# Altium PCB PCB1.PcbDoc (part 3 of 3)
Units mil, origin at the board's own origin, x right, y up, seen from the top; angles counter-clockwise.
Board outline 3937.01 x 3937.01 mil, 4 copper layers (L1, L2, L3, L4), stack 61.851 mil thick; 165 components, 197 nets, 827 pads, 400 vias.
Unrouted connection lines stored in the file: 1.
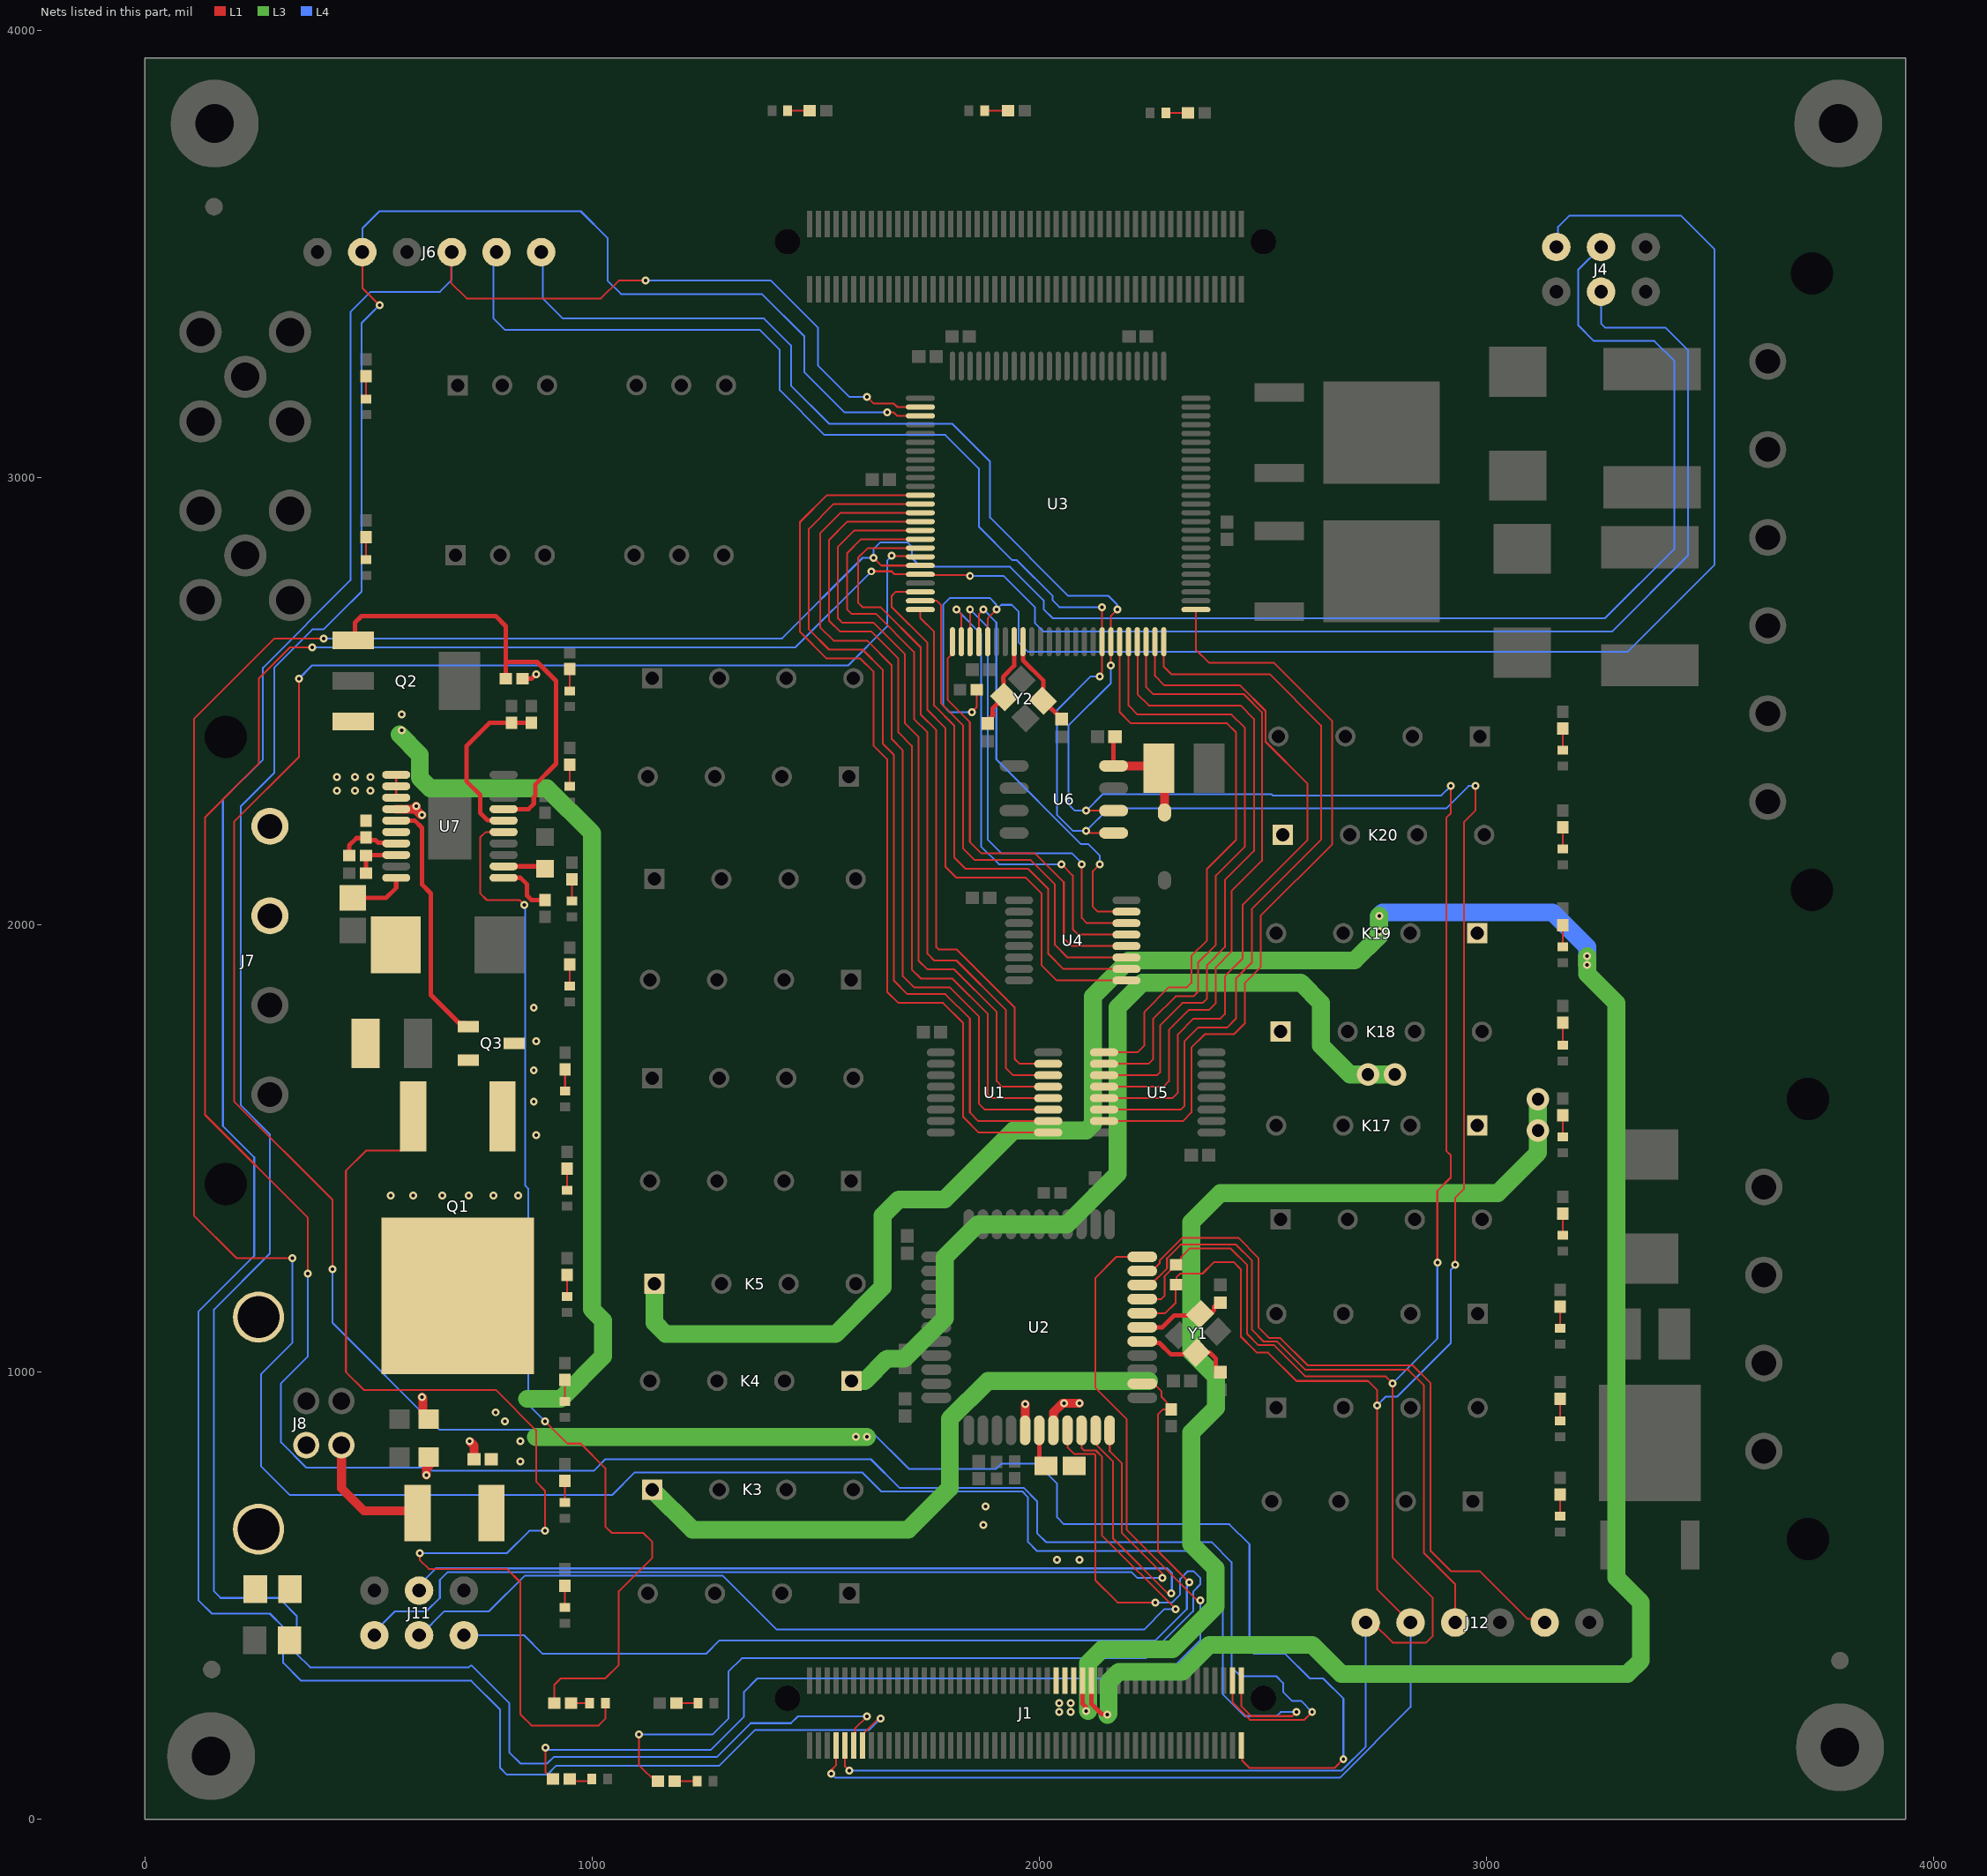
[diagram p5: the nets of this part, all layers, seen from the top]

## Via types
v1: diameter 17.72, hole 7.87, L1 to L4, 396 vias
v2: diameter 50, hole 28, L1 to L4, 4 vias

## Nets (pads, with @x,y where several pads share a name; then routed paths per layer and width w, separated by ;. In a path a pad name is that pad's centre, name@x,y a point inside that pad or via, vN(x,y) a via of type N, cw(c..) or ccw(c..) an arc to the next point about the centre after c; other vN are vias at no path point) (continued)
MOSI: J1.97 J4.4 U3.21 | length 9085.2
  L1 w4: v1(365,1220) 365,1345 135,1575 135,2240 255,2360 255,2550 325,2620 v1(375,2620) ; v1(1625,2790) 1670,2790 1676.85,2783.15 U3.21@1734.14,2783.15 1735.64,2781.66 1843.34,2781.66 v1(1845,2780) ; J1.97@2431.85,310.51 2431.85,261.84 2470.93,222.76 2592.76,222.76 v1(2610,240)
  L4 w4: v1(365,1220) 365,1035 305,975 305,842.67 361.81,785.86 636.57,785.86 643.29,779.14 1004.14,779.14 1030,805 1623.69,805 1687.62,741.07 1965.24,741.07 1995,711.31 1995,640 2015,620 2385,620 2430,575 2430,340 2450,320 2530,320 2545,305 2545,285 2565,265 2585,265 v1(2610,240) ; v1(375,2620) 1455,2620 v1(1625,2790) ; v1(1845,2780) 1920,2780 1990,2710 1990,2675 2010,2655 3280,2655 3450,2825 3450,3285 3400,3335 3265,3335 3255.97,3344.03 J4.4@3255.97,3415
NetC15_2: C15.2 U2.6 | length 85.9
  L1 w4: C15.2@2000,805 C15.2@2015,790
  L1 w10: C15.2@2000,805 U2.6@2000,869.68
NetC18_2: C18.2 U2.16 Y1.1 | length 213.4
  L1 w4: U2.16@2230.31,1068.5 U2.16@2233.6,1065.22 ; Y1.1@2344.43,1040.46 2345.82,1041.85 Y1.1@2347.22,1043.24
  L1 w10: U2.16@2233.6,1065.22 2268.4,1065.22 2293.62,1040 2301.54,1040 2301.73,1039.81 2309.19,1039.81 2309.38,1040 2320.42,1040 2320.88,1040.46 Y1.1@2344.43,1040.46 ; Y1.1@2347.22,1043.24 2381.76,1043.24 2395,1030 C18.2@2395,1000.08
NetC19_2: C19.2 U2.17 Y1.3 | length 207.6
  L1 w4: Y1.3@2352.78,1126.76 Y1.3@2355.57,1129.54
  L1 w10: U2.17@2230.31,1100 2275,1100 2301.76,1126.76 Y1.3@2352.78,1126.76 ; Y1.3@2355.57,1129.54 2379.12,1129.54 2381.7,1132.12 2384.82,1132.12 2390.83,1138.13 2390.83,1145.75 2400,1154.92 C19.2@2407.54,1162.46
NetC20_2: C20.2 C21.2 D1.2 U6.8 | length 274.2
  L1 w4: C20.2@2166.22,2416.93 C20.2@2169.29,2420 ; C21.2@2262.8,2355 C21.2@2267.8,2350 C21.2@2280,2337.8
  L1 w10: U6.8@2166.22,2355 C20.2@2166.22,2416.93
  L1 w20: U6.8@2166.22,2355 C21.2@2262.8,2355 ; D1.2@2280,2250.79 C21.2@2280,2337.8
NetC22_2: C22.2 U3.33 Y2.1 | length 213.6
  L1 w4: C22.2@1890,2460.16 1895.93,2466.09 1902.17,2472.33 ; Y2.1@1920.46,2538.36 1920.46,2510.57 Y2.1@1921.85,2509.18
  L1 w10: C22.2@1890,2460.16 1895.93,2466.09 1895.93,2483.26 Y2.1@1921.85,2509.18 ; Y2.1@1920.46,2538.36 1920.46,2545.17 1919.81,2545.81 1919.81,2553.27 1920.46,2553.92 1920.46,2555.46 1943.79,2578.79 U3.33@1943.79,2632.56
NetC23_2: C23.2 U3.34 Y2.3 | length 212.4
  L1 w4: Y2.3@2009.25,2500.82 Y2.3@2008.15,2500.82 2008.15,2520.29 Y2.3@2009.54,2521.68
  L1 w10: U3.34@1963.48,2632.56 1963.48,2591.53 2009.54,2545.46 2009.54,2528.55 2006.76,2525.77 2006.76,2524.46 Y2.3@2009.54,2521.68 ; Y2.3@2009.25,2500.82 C23.2@2050,2460.08
NetC25_2: C25.2 U7.10 | length 129.1
  L1 w10: C25.2@465,2060 540,2060 562.44,2082.44 U7.10@562.44,2104.84
NetD7_2: D7.2 R11.2 | length 48.4
  L1 w4: R11.2@1188.79,260 D7.2@1237.18,260
NetD10_2: D10.2 R13.2 | length 48.5
  L1 w4: D10.2@1437.82,3820 R13.2@1486.3,3820
NetD11_2: D11.2 R43.2 | length 51.3
  L1 w4: R43.2@948.7,85 D11.2@1000,85
NetD12_1: D12.1 R20.2 | length 41.3
  L1 w4: R20.2@953.7,260 D12.1@995,260
NetD13_2: D13.2 R44.2 | length 50
  L1 w4: R44.2@1185,85 D13.2@1235,85
NetD14_2: D14.2 R22.2 | length 50.6
  L1 w4: D14.2@494.66,2815.88 494.66,2865.96 R22.2@495,2866.3
NetD15_2: D15.2 R23.2 | length 48.4
  L1 w4: D15.2@944.66,1168.69 R23.2@944.66,1217.09
NetD16_2: D16.2 R24.2 | length 48.4
  L1 w4: D16.2@950,1862.82 R24.2@950,1911.21
NetD17_2: D17.2 R25.2 | length 48.4
  L1 w4: D17.2@3165,677.9 R25.2@3165,726.3
NetD18_2: D18.2 R26.2 | length 48.4
  L1 w4: D18.2@3170,1305.43 R26.2@3170,1353.83
NetD19_2: D19.2 R27.2 | length 48.4
  L1 w4: D19.2@3170,1950.43 R27.2@3170,1998.83
NetD20_2: D20.2 R28.2 | length 48.4
  L1 w4: D20.2@939.66,473.69 R28.2@939.66,522.09
NetD21_2: D21.2 R29.2 | length 48.4
  L1 w4: D21.2@944.66,1406.31 R29.2@944.66,1454.71
NetD22_2: D22.2 R30.2 | length 48.4
  L1 w4: D22.2@955,2052.82 R30.2@955,2101.21
NetD23_2: D23.2 R31.2 | length 49.6
  L1 w4: D23.2@3165,890.43 R31.2@3165,940
NetD24_2: D24.2 R32.2 | length 50.9
  L1 w4: D24.2@495,3175.43 R32.2@495,3226.3
NetD25_2: D25.2 R33.2 | length 48.4
  L1 w4: D25.2@3170,2169.2 R33.2@3170,2217.6
NetD26_2: D26.2 R34.2 | length 48.5
  L1 w4: D26.2@939.66,708.69 R34.2@939.66,757.18
NetD27_2: D27.2 R35.2 | length 48.4
  L1 w4: D27.2@940,1627.82 R35.2@940,1676.21
NetD28_2: D28.2 R36.2 | length 48.4
  L1 w4: D28.2@950,2309.31 R36.2@950,2357.7
NetD29_2: D29.2 R37.2 | length 48.4
  L1 w4: D29.2@3165,1097.82 R37.2@3165,1146.21
NetD30_2: D30.2 R38.2 | length 48.4
  L1 w4: D30.2@3170,1525.43 R38.2@3170,1573.83
NetD31_2: D31.2 R39.2 | length 48.4
  L1 w4: D31.2@3170,2390 R39.2@3170,2438.4
NetD32_2: D32.2 R40.2 | length 48.4
  L1 w4: D32.2@939.66,933.69 R40.2@939.66,982.09
NetD33_2: D33.2 R41.2 | length 48.4
  L1 w4: D33.2@950,2522.82 R41.2@950,2571.21
NetD34_2: D34.2 R42.2 | length 50.9
  L1 w4: D34.2@3170,1730.43 R42.2@3170,1781.3
NetD35_2: D35.2 R16.2 | length 52.2
  L1 w4: D35.2@1877.82,3820 R16.2@1930,3820
NetD36_2: D36.2 R21.2 | length 49.8
  L1 w4: D36.2@2282.82,3815 R21.2@2332.6,3815
NetQ1_1: Q1.1 Q3.3 U7.4 | length 73.4
  L1 w4: 598.21,2258.39 604.83,2265 v1(606.89,2265)
  L1 w20: U7.4@562.44,2258.39 598.21,2258.39 ; v1(606.89,2265) 606.89,2256.72 618.61,2245 v1(620,2245)
  other v1: 875,1530 870,1605 870,1675 875,1740 870,1815
NetQ1_4: Q1.4 U7.1 U7.2 U7.3 | length 263.3
  L1 w4: Q1.4@550,1320 Q1.4@700,1170 ; U7.3@562.44,2283.98 U7.2@562.44,2309.57 U7.1@562.44,2335.16
  other v1: 550,1395 600,1395 665,1395 725,1395 780,1395 835,1395 430,2300 470,2300 505,2300 430,2330 470,2330 505,2330
NetQ2_1: Q2.1 R9.1 U7.17 | length 1009.7
  L1 w4: Q2.1@465.91,2635.55 Q2.1@470,2639.65
  L1 w10: Q2.1@470,2639.65 470,2675 485,2690 785,2690 807.52,2667.48 807.52,2587.52 ; U7.17@802.6,2258.39 858.39,2258.39 870,2270 870,2285 873.2,2288.2 873.2,2313 920,2359.8 920,2545 877.48,2587.52 807.52,2587.52 ; R9.1@807.52,2550 807.52,2587.52
NetQ3_1: Q3.1 U7.5 | length 570.1
  L1 w4: Q3.1@712.99,1772.4 Q3.1@723.82,1772.4
  L1 w10: U7.5@562.44,2232.8 603.94,2232.8 620,2216.74 620,2090 640,2070 640,1843.12 663.51,1819.61 702.92,1780.2 716.02,1780.2 Q3.1@723.82,1772.4
NetR8_1: R8.1 R10.2 U7.16 | length 370.9
  L1 w10: U7.16@802.6,2232.8 802.11,2233.29 766.71,2233.29 750,2250 750,2290 720,2320 720,2400 771.3,2451.3 792.52,2451.3 805,2451.3 ; R8.1@820,2451.3 R10.2@862.52,2451.3
NetR14_1: R14.1 U7.11 | length 127.7
  L1 w10: U7.11@802.6,2104.84 840.16,2104.84 855,2090 855,2065 865,2055 R14.1@895,2055
NetR15_1: R15.1 R17.2 U7.7 | length 142.1
  L1 w4: R15.1@493.55,2193.55 R15.1@495,2195 500,2195 R15.1@502.5,2192.5
  L1 w10: R17.2@457.6,2155 457.6,2177.6 473.55,2193.55 R15.1@493.55,2193.55 ; R15.1@502.5,2192.5 502.5,2189.2 502.8,2188.9 516.69,2188.9 522.5,2183.09 560.96,2183.09 U7.7@562.44,2181.61
NetR17_1: R17.1 R18.2 U7.8 | length 107.9
  L1 w4: R17.1@495,2155 R17.1@496.02,2156.02
  L1 w10: R18.2@495,2115 R17.1@495,2155 ; R17.1@496.02,2156.02 U7.8@562.44,2156.02
NetR19_2: R19.2 U7.12 | length 94.7
  L1 w4: R19.2@889.57,2130.43 R19.2@895,2125
  L1 w10: U7.12@802.6,2130.43 R19.2@889.57,2130.43
RELAY0: U1.1 U3.12 | length 2082.2
  L1 w4: U3.12@1734.14,2960.32 1525.32,2960.32 1465,2900 1465,2655 1525,2595 1600,2595 1630,2565 1630,2400 1660,2370 1660,1850 1685,1825 1785,1825 1830,1780 1830,1570 1864.57,1535.43 U1.1@2020.08,1535.43
RELAY1: U1.2 U3.13 | length 2003
  L1 w4: U3.13@1734.14,2940.63 1540.63,2940.63 1485,2885 1485,2660 1530,2615 1605,2615 1650,2570 1650,2405 1675,2380 1675,1875 1705,1845 1790,1845 1845,1790 1845,1580 1863.98,1561.02 U1.2@2020.08,1561.02
RELAY2: U1.3 U3.14 | length 1916.6
  L1 w4: U3.14@1734.14,2920.95 1555.95,2920.95 1510,2875 1510,2665 1540,2635 1615,2635 1670,2580 1670,2415 1695,2390 1695,1885 1720,1860 1800,1860 1865,1795 1865,1600 1878.39,1586.61 U1.3@2020.08,1586.61
RELAY3: U1.4 U3.15 | length 1828.6
  L1 w4: U3.15@1734.14,2901.26 1571.26,2901.26 1530,2860 1530,2680 1555,2655 1625,2655 1685,2595 1685,2430 1715,2400 1715,1900 1735,1880 1805,1880 1885,1800 1885,1620 1892.8,1612.2 U1.4@2020.08,1612.2
RELAY4: U1.5 U3.16 | length 1737.6
  L1 w4: U3.16@1734.14,2881.58 1586.58,2881.58 1550,2845 1550,2685 1560,2675 1630,2675 1700,2605 1700,2450 1730,2420 1730,1920 1750,1900 1810,1900 1905,1805 1905,1650 1917.2,1637.8 U1.5@2020.08,1637.8
RELAY5: U1.6 U3.17 | length 1637.9
  L1 w4: U3.17@1734.14,2861.89 1601.89,2861.89 1570,2830 1570,2705 1580,2695 1635,2695 1720,2610 1720,2460 1750,2430 1750,1935 1765,1920 1815,1920 1925,1810 1925,1680 1941.61,1663.39 U1.6@2020.08,1663.39
RELAY6: U1.7 U3.18 | length 1539.8
  L1 w4: U3.18@1734.14,2842.21 1617.21,2842.21 1595,2820 1595,2720 1605,2710 1645,2710 1735,2620 1735,2470 1770,2435 1770,1950 1775,1945 1815,1945 1945,1815 1945,1700 1956.02,1688.98 U1.7@2020.08,1688.98
RELAY7: U3.23 U4.1 | length 1326.7
  L1 w4: U3.23@1734.14,2743.78 1678.78,2743.78 1670,2735 1670,2710 1750,2630 1750,2480 1790,2440 1790,2130 1815,2105 1970,2105 2005,2070 2005,1910 2039.57,1875.43 U4.1@2195.08,1875.43
RELAY8: U3.25 U4.2 | length 1159
  L1 w4: U3.25@1734.14,2704.41 1734.14,2685.86 1765,2655 1765,2490 1810,2445 1810,2150 1835,2125 1975,2125 2020,2080 2020,1935 2053.98,1901.02 U4.2@2195.08,1901.02
RELAY9: U3.24 U4.3 | length 1160.3
  L1 w4: U3.24@1734.14,2724.1 1770.9,2724.1 1780,2715 1780,2495 1830,2445 1830,2170 1855,2145 1980,2145 2035,2090 2035,1955 2063.39,1926.61 U4.3@2195.08,1926.61
RELAY10: U3.26 U4.4 | length 992.6
  L1 w4: U3.26@1805.99,2632.56 1805.99,2605.99 1795,2594.99 1795,2502.72 1845,2452.72 1845,2185 1870,2160 1990,2160 2055,2095 2055,1970 2072.8,1952.2 U4.4@2195.08,1952.2
RELAY11: U3.27 U4.5 | length 1106.7
  L1 w4: v1(1815,2705) 1825.68,2694.32 U3.27@1825.68,2632.56 ; v1(2050,2135) 2075,2110 2075,1990 2087.2,1977.8 U4.5@2195.08,1977.8
  L4 w4: v1(1815,2705) 1870,2650 1870,2175 1910,2135 v1(2050,2135)
RELAY12: U3.28 U4.6 | length 1063.4
  L1 w4: v1(1845,2705) 1845.18,2704.82 1845.18,2632.74 U3.28@1845.37,2632.56 ; v1(2095,2135) 2095,2015 2106.61,2003.39 U4.6@2195.08,2003.39
  L4 w4: v1(1845,2705) 1885,2665 1885,2190 1915,2160 2072.66,2160 2095,2137.66 v1(2095,2135)
RELAY13: U3.29 U4.7 | length 944.7
  L1 w4: U3.29@1865.05,2632.56 1865.05,2693.94 1875,2703.89 v1(1875,2705) ; v1(2135,2135) 2120,2120 2120,2040 2131.02,2028.98 U4.7@2195.08,2028.98
  L4 w4: v1(1875,2705) 1904.14,2675.86 1904.14,2369.54 2093.69,2180 2110,2180 2135,2155 v1(2135,2135)
RELAY14: U3.45 U5.1 | length 1341
  L1 w4: U5.1@2144.92,1714.57 2219.57,1714.57 2235,1730 2235,1805 2290,1860 2330,1860 2340,1870 2340,1930 2375,1965 2375,2125 2440,2190 2440,2430 2420,2450 2205,2450 2180.01,2474.99 U3.45@2180.01,2632.56
RELAY15: U3.46 U5.2 | length 1386.4
  L1 w4: U5.2@2144.92,1688.98 2243.98,1688.98 2255,1700 2255,1790 2305,1840 2345,1840 2355,1850 2355,1915 2395,1955 2395,2110 2460,2175 2460,2440 2430,2470 2220,2470 2199.7,2490.3 U3.46@2199.7,2632.56
RELAY16: U3.47 U5.3 | length 1431.8
  L1 w4: U5.3@2144.92,1663.39 2263.39,1663.39 2270,1670 2270,1775 2320,1825 2365,1825 2375,1835 2375,1910 2415,1950 2415,2100 2480,2165 2480,2460 2450,2490 2245,2490 2220,2515 2220,2631.94 U3.47@2219.38,2632.56
RELAY17: U3.48 U5.4 | length 1471.2
  L1 w4: U5.4@2144.92,1637.8 2277.8,1637.8 2290,1650 2290,1765 2335,1810 2380,1810 2395,1825 2395,1905 2430,1940 2430,2075 2498.02,2143.02 2498.02,2474.64 2457.66,2515 2255,2515 2239.07,2530.93 U3.48@2239.07,2632.56
RELAY18: U3.49 U5.5 | length 1573.5
  L1 w4: U5.5@2144.92,1612.2 2297.2,1612.2 2310,1625 2310,1755 2345,1790 2405,1790 2415,1800 2415,1885 2455,1925 2455,2045 2600,2190 2600,2315.03 2506.02,2409.01 2506.02,2477.95 2448.97,2535 2280,2535 2258.75,2556.25 U3.49@2258.75,2632.56
RELAY19: U3.50 U5.6 | length 1660
  L1 w4: U5.6@2144.92,1586.61 2316.61,1586.61 2325,1595 2325,1740 2355,1770 2420,1770 2440,1790 2440,1880 2475,1915 2475,2035 2630,2190 2630,2445 2515,2560 2295,2560 2278.44,2576.56 U3.50@2278.44,2632.56
RELAY20: U3.51 U5.7 | length 1707.1
  L1 w4: U5.7@2144.92,1561.02 2321.02,1561.02 2340,1580 2340,1725 2370,1755 2435,1755 2460,1780 2460,1870 2495,1905 2495,2020 2655,2180 2655,2455 2525,2585 2380,2585 2350.29,2614.71 U3.51@2350.29,2704.41
RST: J4.5 R1.1 U3.30 | length 3489.9
  L1 w4: v1(1849.14,2475) 1860,2485.86 R1.1@1860,2525 ; U3.30@1884.74,2632.56 1884.74,2684.74 v1(1905,2705)
  L4 w4: v1(1849.14,2475) 1800,2475 1785,2490 1785,2715 1800,2730 1890,2730 1903.49,2716.51 1903.49,2706.51 v1(1905,2705) 1915.11,2715.11 1938.58,2715.11 1954.34,2699.34 1954.34,2630.66 1975,2610 3315,2610 3510,2805 3510,3510 3435,3585 3185,3585 3160,3560 3160,3519.03 J4.5@3155.97,3515
SCK: J1.99 J4.3 U3.20 | length 9499.3
  L1 w4: v1(330,1255) 205,1255 110,1350 110,2460 290,2640 v1(400,2640) ; v1(1630,2820) 1647.16,2802.84 U3.20@1734.14,2802.84 ; J1.99@2451.54,310.51 2451.54,253.46 2474.24,230.76 2565.76,230.76 v1(2575,240)
  L4 w4: v1(330,1255) 330,1065 260,995 260,790 325,725 1045,725 1095,775 1605,775 1646.93,733.07 1961.93,733.07 1975,720 1975,620 1995,600 2380,600 2410,570 2410,280 2459.24,230.76 2530.53,230.76 2539.78,240 v1(2575,240) ; v1(400,2640) 1425,2640 1605,2820 v1(1630,2820) 1630,2840 1645,2855 1705,2855 1715,2845 1715,2820 1735,2800 1935,2800 2010,2725 2010,2705 2030,2685 3265,2685 3420,2840 3420,3260 3375,3305 3240,3305 3205,3340 3205,3464.03 J4.3@3255.97,3515
SCL: J1.8 J6.5 J12.5 R6.1 U2.18 U3.43 U6.5 | length 7958.6
  L1 w4: v1(1535,102.5) 1535,110 1546.02,121.02 J1.8@1546.02,164.84 ; v1(2105,2210) 2108.71,2210 2113.71,2205 U6.5@2166.22,2205 ; v1(2135,2555) 2135,2558.71 2140.64,2564.35 U3.43@2140.64,2632.56 2140.32,2632.88 2140.32,2709.68 v1(2140,2710) ; U2.18@2230.31,1131.5 2281.5,1131.5 2305,1155 2305,1193.7 R6.1@2306.3,1195 2306.45,1195.15 2306.45,1211.45 2315,1220 2365,1220 2390.86,1245.86 2434.14,1245.86 2450.86,1229.14 2450.86,1079.14 2480,1050 2486.73,1043.27 2511.73,1043.27 2575,980 2735,980 2755,960 v1(2755,925) 2755,515 J12.5@2830,440 ; v1(2930,1240) 2930,1390 2950,1410 2950,2230 2975,2255 v1(2975,2310)
  L4 w4: J6.5@786.57,3503.66 780,3497.09 780,3355 805,3330 1375,3330 1420,3285 1420,3195 1520,3095 1790,3095 1865,3020 1865,2890 1940,2815 1950,2815 2030,2735 2030,2725 2045,2710 v1(2140,2710) ; v1(1535,102.5) 1544.37,93.13 2671.87,93.13 2830,251.26 J12.5@2830,440 ; v1(2135,2555) 2115,2555 2040,2480 2040,2245 2075,2210 v1(2105,2210) 2155,2260 2910,2260 2960,2310 v1(2975,2310) ; v1(2755,925) 2775,945 2800,945 2920,1065 2920,1228.12 2930,1238.12 v1(2930,1240)
SDA: J1.10 J6.6 J12.6 R4.1 U2.19 U3.44 U6.6 | length 7777.4
  L1 w4: J1.10@1565.71,164.84 1565.71,118.28 v1(1575,108.99) ; v1(2105,2255) U6.6@2166.22,2255 ; v1(2160,2580) 2160.16,2580.16 2160.16,2632.4 U3.44@2160.33,2632.56 2160.33,2690.33 v1(2175,2705) ; U2.19@2230.31,1162.99 2272.99,1162.99 2280,1170 2280,1213.7 2294.52,1228.22 2294.52,1229.2 2305.31,1240 R4.1@2306.3,1240 2316.45,1250.15 2316.45,1256.45 2335.86,1275.86 2428.14,1275.86 2465,1239 2465,1085 2490,1060 2525,1060 2595,990 2775,990 v1(2790,975) 2790,585 2880,495 2880,410 2865,395 2790,395 2745,440 J12.6@2730,440 ; v1(2890,1245) 2890,1405 2920,1435 2920,1485 2910,1495 2910,2238.99 2920,2248.99 v1(2920,2310)
  L4 w4: J6.6@886.57,3503.66 890,3500.24 890,3400 935,3355 1385,3355 1445,3295 1445,3205 1530,3120 1805,3120 1890,3035 1890,2910 2065,2735 2155,2735 2173.49,2716.51 2173.49,2706.51 v1(2175,2705) ; v1(1575,108.99) 2676.42,108.99 2730,162.57 J12.6@2730,440 ; v1(2160,2580) 2160,2540 2065,2445 2065,2270 2080,2255 v1(2105,2255) 2141.72,2291.72 2519.14,2291.72 2521.72,2289.14 2899.14,2289.14 v1(2920,2310) ; v1(2790,975) 2890,1075 v1(2890,1245)
SS: J1.100 U3.19 | length 6392.1
  L1 w4: v1(345,2550) 345,2375 200,2230 200,1605 420,1385 v1(420,1230) ; v1(1670,2825) 1671.24,2823.76 1732.91,2823.76 U3.19@1734.14,2822.52 ; J1.100@2451.54,164.84 2453.34,163.04 2453.34,131.66 2470,115 2660,115 v1(2680,135)
  L3 w4: v1@1670,2823.99 v1(1670,2825)
  L4 w4: v1(345,2550) 374.52,2579.52 1572.79,2579.52 1660,2666.72 1660,2813.99 v1@1670,2823.99 ; v1(420,1230) 420,1110 659.14,870.86 1621.57,870.86 1709.14,783.28 1903.36,783.28 1915.07,795 1995,795 2040,750 2040,675 2055,660 2425,660 2470,615 2470,380 2480,370 2550,370 2605,315 2635,315 2680,270 v1(2680,135)
UGND: C15.1 C17.1 J8.4 L1.2 L2.1 U2.5 Z1.2 Z2.2 | length 213.6
  L1 w4: L1.2@323.79,513.79 L1.2@325,515 ; Z2.2@634.96,810 Z2.2@644.96,800 ; v1(726.38,845.86) v1@729.16,843.08 ; 736.42,833.58 736.42,835.82
  L1 w20: v1(620,944.14) 622.36,941.78 622.36,906.65 634.02,895 Z1.2@635,895 ; v1(630,770) 630,785.04 Z2.2@644.96,800 ; v1@729.16,843.08 736.42,835.82 ; C17.1@736.42,805 736.42,833.58 ; U2.5@1968.5,869.68 v1(1968.5,928.5)
  L3 w4: v1@725,845 725.86,845.86 v1(726.38,845.86)
  other v1: 1875,657.91 1880,700
USB_MISO: J11.1 U2.11 | length 2231.2
  L1 w4: U2.11@2157.48,869.68 2157.48,823.11 2185,795.59 2185,640 2275,550 v1(2275,540)
  L4 w4: J11.1@513.51,411.65 513.51,418.51 560,465 630,465 660,495 660,535 678,553 2205.74,553 2218.74,540 v1(2275,540)
USB_MOSI: J11.4 U2.10 | length 2200.1
  L1 w4: U2.10@2125.98,869.68 2129.74,865.93 2129.74,835.26 2165,800 2165,627.57 2287.57,505 v1(2295,505)
  L4 w4: J11.4@613.51,511.65 613.51,523.51 651,561 2286.43,561 2296.51,550.92 2296.51,506.51 v1(2295,505)
USB_RST: J11.5 R7.1 U2.13 | length 2260.2
  L1 w4: U2.13@2230.31,974.02 2255.98,974.02 2273.55,956.45 2273.55,944.03 R7.1@2288.43,929.14 ; R7.1@2295,916.1 2294.56,916.54 2276.54,916.54 2265,905 2265,600 v1(2335,530)
  L4 w4: J11.5@713.51,411.65 848.35,411.65 890,370 1255,370 1285,400 2260,400 2330,470 2330,521.29 2335,526.29 v1(2335,530)
USB_RX: J12.4 U2.20 | length 1460.8
  L1 w4: U2.20@2230.31,1194.49 2248.46,1194.49 2285.66,1231.69 2285.66,1254.42 2316.24,1285 2440,1285 2475,1250 2475,1095 2502,1068 2532,1068 2595,1005 2825,1005 2860,970 2860,595 2930,525 J12.4@2930,440
USB_RX_LED: R44.1 U2.8 | length 2322.1
  L1 w4: v1(1105,190) 1105,121.61 1146.61,80 R44.1@1147.6,80 ; U2.8@2062.99,869.68 2062.99,832.01 2078.33,816.67 2123.19,816.67 2125.53,814.33 2125.53,534.47 2175,485 v1(2260,485)
  L4 w4: v1(1105,190) 1270,190 1305,225 1305,330 1335,360 2238.74,360 2344.14,465.4 2344.14,509.14 2360,525 2360,540 2345,555 2332.5,555 2315,537.5 2315,502.57 2297.43,485 v1(2260,485)
USB_SCK: J11.3 U2.9 | length 2318.2
  L1 w4: U2.9@2094.49,869.68 2094.49,830.22 2100.04,824.67 2126.5,824.67 2140,811.17 2140,635 v1(2305,470)
  L4 w4: J11.3@613.51,411.65 616.65,411.65 670,465 770,465 850,545 1292,545 1412.86,424.14 2234.14,424.14 2280,470 v1(2305,470)
USB_SHIELD: J8.5 J8.6 L1.1 | length 10.2
  L1 w4: L1.1@247.44,515 L1.1@254.65,522.21
USB_TX: J12.2 U2.21 | length 1600.6
  L1 w4: U2.21@2230.31,1225.98 2251.97,1225.98 2269.78,1243.8 2269.78,1249.85 2319.93,1300 2445,1300 2490,1255 2490,1100 2514,1076 2539,1076 2600,1015 2835,1015 2875,975 2875,600 2920,555 2985,555 3092.11,447.89 3122.11,447.89 J12.2@3130,440
USB_TX_LED: R43.1 U2.22 | length 2712.7
  L1 w4: v1(896.3,160) 896.3,105.31 911.61,90 R43.1@912.6,90 ; U2.22@2230.31,1257.48 2172.48,1257.48 2125,1210 2125,965 2195,895 2195,647.57 2352.57,490 v1(2360,490)
  L4 w4: v1@895,155 1265,155 1340,230 1340,285 1370,315 2275,315 2360,400 v1(2360,490)
VIN: C24.2 D9.1 D12.2 J7.1 J7.2 Q1.3 Q3.2 R15.2 U7.6 | length 2489.6
  L1 w4: Q1.3@600,1571.57 600,1522.36 572.47,1494.83 494.83,1494.83 450,1450 450,1000 490,960 613.23,960 613.37,960.14 627.49,960.14 627.63,960 785,960 875,870 875,755 895,735 v1(895,645) ; v1(615,595) 615,580 635,560 810,560 840,530 840,235 865,210 1015,210 1030.43,225.43 D12.2@1030.43,260
  L4 w4: v1(615,595) 810,595 860,645 v1(895,645)
VIN_ALARM: R20.1 U7.15 | length 2402.8
  L1 w4: U7.15@802.6,2207.2 762.2,2207.2 750,2195 750,2070 765,2055 838.33,2055 v1(849.17,2044.17) ; v1(895,890) 945,840 975,840 1030,785 1030,655 1045,640 1115,640 1135,620 1135,585 1060,510 1060,345 1030,315 930,315 916.3,301.3 R20.1@916.3,260
  L4 w4: v1(849.17,2044.17) 850.86,2042.47 850.86,1416.57 857.34,1410.09 857.34,927.66 v1(895,890)
VISB_RX: J1.14 J6.4 U3.2 | length 6654.6
  L1 w4: J6.4@686.57,3503.66 685,3502.09 685,3435 720,3400 1020,3400 1060,3440 v1(1120,3440) ; J1.14@1605.08,164.84 1608.98,168.75 1608.98,193.98 1640,225 v1(1645,225) ; v1(1615,3180) 1630,3165 1675,3165 1682.83,3157.17 U3.2@1734.14,3157.17
  L4 w4: J6.4@686.57,3503.66 686.57,3441.57 660,3415 505,3415 460,3370 460,2770 264.34,2574.34 264.34,2369.34 175,2280 175,1550 245,1480 245,1260 120,1135 120,490 150,460 280,460 310,430 310,350 350,310 730,310 795,245 795,115 810,100 900,100 920,120 1285,120 1365,200 1620,200 v1(1645,225) ; v1(1120,3440) 1400,3440 1505,3335 1505,3250 1575,3180 v1(1615,3180)
VISB_TX: J1.12 J6.2 U3.3 | length 6698.7
  L1 w4: J6.2@486.57,3503.66 486.57,3423.43 v1(525,3385) ; J1.12@1585.39,164.84 1588.03,167.48 1588.03,203.03 v1(1615,230) ; v1(1660,3145) 1675,3145 1682.52,3137.48 U3.3@1734.14,3137.48
  L4 w4: J6.2@486.57,3503.66 486.57,3556.57 525,3595 975,3595 1035,3535 1035,3440 1065,3410 1380,3410 1475,3315 1475,3235 1565,3145 v1(1660,3145) ; v1(525,3385) 485,3345 485,2745 435,2695 400,2660 375,2660 290,2575 290,2340 215,2265 215,1596.31 280,1531.31 280,1265 155,1140 155,510 170,495 302.66,495 305,492.66 305,490 340,455 340,370 370,340 725,340 728.34,343.34 731.66,343.34 815,260 815,150 840,125 900,125 915,140 1280,140 1355,215 1445,215 1460,230 v1(1615,230)
VUSB: C17.2 F1.2 Q2.3 R9.2 U2.7 | length 2822.2
  L1 w4: v1@874.7,2560 v1(875,2560)
  L1 w10: R9.2@844.92,2550 864.7,2550 v1@874.7,2560
  L1 w20: U2.7@2031.5,869.68 2031.84,870.03 2031.84,910.12 2051.72,930 v1(2055,930) v1(2090,930)
  L3 w40: 570,2425 615,2380 615,2328.43 638.43,2305 900,2305 1000,2205 1000,1140 1025,1115 1025,1035 930,940 855,940 ; 875,855 v1(1590,855) v1(1615,855)
  other v1: 2040,580 2090,580 840,800 840,845 805,890 785,910 575,2435 575,2470
X1: J1.57 J1.59 J1.61 K3.1 K17.1 K18.1 K19.1 K20.1 | length 1376.1
  L3 w40: K3.1@1134.66,737.1 1224.44,647.31 1707.31,647.31 1800,740 1800,895 1885,980 2245,980
  other v1: 2045,240 2070,240 2045,260 2070,260
X2: J1.63 K4.1 | length 4443.4
  L1 w10: J1.63@2097.2,310.51 2097.2,257.8 2104.59,250.41 v1(2104.59,242.39)
  L3 w40: K4.1@1580,980 1610,980 1660,1030 1698.77,1030 1789,1120.23 1789,1256.77 1862.23,1330 2061.97,1330 2175,1443.03 2175,1815 2230,1870 2585,1870 2630,1825 2630,1730 2695,1665 v2(2735,1665) v2(2795,1665) ; v1@2109.17,242.39 2109.17,349.17 2140,380 2297.88,380 2393.86,475.98 2393.86,561.14 2340,615 2340,865 2395,920 2395,990 2340,1045 2340,1335 2405,1400 3025,1400 3115,1490 v2(3115,1540) v2(3115,1610)
  L4 w4: v2(2795,1665) 2795,1655 v2@2805,1655
X3: J1.65 K5.1 | length 6037.6
  L1 w10: J1.65@2116.89,310.51 2116.89,258.11 2139.98,235.02 2151.39,235.02 v1(2152.55,233.86)
  L3 w40: K5.1@1139.66,1197.1 1139.66,1110.34 1165,1085 1545,1085 1650,1190 1650,1350 1685.89,1385.89 1788.66,1385.89 1942.77,1540 2105,1540 2120,1555 2120,1840 2200,1920 2705,1920 2760,1975 v1(2760,1985) v1(2760,2020) ; v1(2152.55,233.86) 2155,236.3 2155,306.57 2178.43,330 2320,330 2380,390 2610,390 2675,325 3315,325 3345,355 3345,485 3290,540 3290,1825 3225,1890 v1(3225,1910) v1(3225,1930)
  L4 w40: 2760,1975 v1(2760,1985) v1(2760,2020) 2767.52,2027.52 3147.48,2027.52 3225,1950 v1(3225,1930) v1(3225,1910)
XVCC: F1.1 J8.1 | length 289.3
  L1 w4: F1.1@605,690 F1.1@610,685
  L1 w20: J8.1@440.08,836.57 440.08,739.92 490,690 F1.1@605,690
pads on no net: FD1.0 FD2.0 FD3.0 J1. J1.16 J1.18 J1.20 J1.22 J1.24 J1.26 J1.27 J1.28 J1.29 J1.30 J1.31 J1.32 J1.33 J1.34 J1.35 J1.36 J1.37 J1.38 J1.39 J1.40 J1.41 J1.42 J1.43 J1.44 J1.45 J1.46 J1.47 J1.48 J1.49 J1.50 J1.51 J1.52 J1.53 J1.54 J1.55 J1.56 J1.58 J1.60 J1.62 J1.64 J1.66 J1.68 J1.70 J1.72 J1.74 J1.75 J1.76 J1.77 J1.78 J1.79 J1.80 J1.81 J1.82 J1.83 J1.84 J1.85 J1.86 J1.87 J1.88 J1.89 J1.90 J1.91 J1.92 J1.93 J1.94 J1.96 J1.98 J2. J2.16 J2.18 J2.20 J2.22 J2.24 J2.26 J2.28 J2.30 J2.31 J2.32 J2.33 J2.34 J2.35 J2.36 J2.37 J2.38 J2.39 J2.41 J2.43 J2.45 J2.47 J2.49 J2.51 J2.53 J2.55 J2.57 J2.59 J2.61 J2.63 J2.65 J2.67 J2.69 J2.71 J2.72 J2.73 J2.74 J2.75 J2.76 J2.77 J2.78 J2.79 J2.81 J2.83 J2.85 J2.87 J3.MH1 J3.MH2 J5.MH1 J5.MH2 J7.FS1 J7.FS2 U2.1 U2.12 U2.25 U2.26 U2.27 U2.30 U2.31 U2.32 U2.33 U2.36 U2.37 U2.38 U2.39 U2.40 U6.2 U6.7 U7.13 U7.21

## Polygon pours and split planes (outlines as drawn)
GND on L1 "GND_L01_P070" (solid, pour order 70): 2137.48,288.56 2197.55,220 2315,220 2325,230 2325,265 2315,275 2210,275 2200,285
+5V on L1 "+5V_L01_P023" (solid, pour order 23): 765,2430 910,2430 910,2365 900,2355 875,2355 860,2340 860,2270 760,2270 760,2300 755,2300 730,2325 730,2395
VIN on L1 "VIN_L01_P010" (solid, pour order 10): 215,2275 635,2275 635,1475 395,1475 395,1845 335,1905 245,1905 240,1910 215,1940
NetQ1_4 on L1 "NETQ1_4_L01_P022" (solid, pour order 22): 620,2280 620,2400 380,2400 290,2310 290,2280
-20V on L1 "-20V_L01_P059" (solid, pour order 59): 2475,2995 2605,2995 2605,3245 2655,3295 2895,3295 2940,3250 2940,3125 2965,3100 3190,3100 3225,3065 3455,3065 3490,3100 3490,3285 3450,3325 3055,3325 2980,3400 2510,3400 2475,3365
COM on L1 "COM_L01_P058" (solid, pour order 58): 2570,2630 2595,2655 2595,2915 2625,2945 2650,2945 2650,2980 2515,2980 2445,2910 2445,2680 2495,2630
VIN on L1 "VIN_L01_P017" (solid, pour order 17): 755,1475 755,1485 755,1820 595,1820 550,1775 550,1475
X1 on L1 "X1_L01_P041" (solid, pour order 41): 2030,345 2030,230 2035,225 2080,225 2085,230 2085,345
+5V on L1 "+5V_L01_P078" (solid, pour order 78): 1675,1030 1660,1015 1660,945 1680,925 1760,925 1800,885 1800,790 1810,780 1880,780 1890,790 1890,1265 1870,1285 1675,1285
+5V on L1 "+5V_L01_P085" (solid, pour order 85): 1530,280 1530,370 1490,410 1405,410 1345,470 1275,470 1255,450 1255,395 1370,280
GND on L1 "GND_L01_P082" (solid, pour order 82): 1480,195 1535,195 1535,125 1515,105 1515,80 1505,70 1435,70 1420,85 1420,160 1430,170 1460,170
+5V on L1 "+5V_L01_P081" (solid, pour order 81): 2150,1502.02 2162.02,1502.02 2210,1550 2450,1550 2470,1530 2470,1425 2445,1400 2146.17,1400 2143.17,1397
+5V on L1 "+5V_L01_P080" (solid, pour order 80): 1730,1520 1715,1505 1715,1395 1740,1370 2140,1370 2155,1400 2155,1465 2155,1520
no net on L1 "NONET_L01_P072" (solid, pour order 72): 2150,340 2150,280
no net on L1 "NONET_L01_P071" (solid, pour order 71): 2125,340
no net on L1 "NONET_L01_P069" (solid, pour order 69): 2150,340
COM on L1 "COM_L01_P057" (solid, pour order 57): 2970,2810 3005,2775 3155,2775 3210,2830 3210,2910 3230,2930 3230,3035 3175,3090 2955,3090 2925,3120 2925,3245 2885,3285 2660,3285 2610,3235 2610,2945 2945,2945 2970,2920
+20V on L1 "+20V_L01_P056" (solid, pour order 56): 2635,2935 2630,2935 2605,2910 2605,2665 2640,2630 2955,2630 2980,2605 2980,2555 3010,2525 3170,2525 3195,2550 3195,2675 3515,2675 3530,2690 3530,2890 3505,2915 3245,2915 3220,2890 3220,2825 3165,2765 3000,2765 2955,2810 2955,2910 2930,2935
-20V_In on L1 "-20V_IN_L01_P054" (solid, pour order 54): 3240,2930 3485,2930 3550,2995 3700,2995 3740,3035 3740,3285 3717.5,3307.5 3705,3320 3530,3320 3500,3290 3500,3090 3465,3055 3265,3055 3240,3030
+20V_In on L1 "+20V_IN_L01_P053" (solid, pour order 53): 3240,2660 3240,2245 3290,2195 3660,2195 3730,2265 3730,2540 3690,2580 3595,2580 3515,2660
GND on L1 "GND_L01_P051" (solid, pour order 51): 3235,680 3235,555 3350,555 3390,515 3390,415 3430,375 3695,375 3730,410 3730,665 3725,665 3705,685 3700,680
+6V on L1 "+6V_L01_P040" (solid, pour order 40): 3505,690 3235,690 3195,730 3195,1670 3245,1720 3735,1720 3775,1680 3775,1590 3230,1590 3230,1380 3275,1335 3490,1335 3505,1320 3505,1175 3505,1170 3505,1165 3360,1165 3360,990 3365,985 3505,985
GND on L1 "GND_L01_P038" (solid, pour order 38): 3245,1580 3245,1390 3285,1350 3505,1350 3525,1330 3525,1155 3540,1140 3750,1140 3770,1165 3770,1170 3770,1550 3740,1580
+6V_In on L1 "+6V_IN_L01_P036" (solid, pour order 36): 3515,1155 3365,1155 3365,1000 3375,990 3515,990
+6V_In on L1 "+6V_IN_L01_P035" (solid, pour order 35): 3725,710 3780,765 3780,1085 3745,1120 3565,1120 3515,1120 3515,710
VUSB on L1 "VUSB_L01_P034" (solid, pour order 34): 1775,755 1765,765 1595,765 1550,810 1550,880 1785,880 1785,765
VUSB on L1 "VUSB_L01_P029" (solid, pour order 29): 1775,855 1785,845 1785,640 1810,615 2105,615 2120,600 2120,515 2110,505 1675,505 1660,520 1660,570 1640,590 1640,855
+5V on L1 "+5V_L01_P033" (solid, pour order 33): 380,2610 360,2590 360,2510 365,2505 625,2505 635,2495 635,2465 650,2450 750,2450 770,2470 845,2470 845,2650 815,2690 790,2690 560,2690 540,2670 540,2625 525,2610
VUSB on L1 "VUSB_L01_P030" (solid, pour order 30): 375,2495 375,2410 615,2410 625,2420 625,2495 620,2500 380,2500
UGND on L1 "UGND_L01_P028" (solid, pour order 28): 2115,809.13 2115,654.13 2085,624.13 1850,624.13 1850,739.13 1990,739.13 1990,809.13
VUSB on L1 "VUSB_L01_P025" (solid, pour order 25): 760,815 715,770 715,620 730,605 850,605 875,630 875,735 860,750 860,855 760,955
NetQ1_1 on L1 "NETQ1_1_L01_P011" (solid, pour order 11): 755,1880 755,1475 905,1475 905,1880
NetQ1_4 on L1 "NETQ1_4_L01_P019" (solid, pour order 19): 485,1470 485,982.5 910,982.5 910,1470
UGND on L1 "UGND_L01_P008" (solid, pour order 8): 278.14,592.07 280,590.21 280,285 450,285 450,895 280,895 275,890 280,885 280,285
no net on L1 "NONET_L01_P006" (solid, pour order 6): 400,870
USB_SHIELD on L1 "USB_SHIELD_L01_P003" (solid, pour order 3): 280,465 95,465 95,1195 100,1200 375,1200 375,1040 300,965 300,820 340,780 340,600 320,580 275,580 280,575
GND on L1 "GND_L01_P001" (solid, pour order 1): 280,285 280,465 95,465 95,285
no net on L1 "NONET_L01_P002" (solid, pour order 2): 295,335
no net on L1 "NONET_L01_P000" (solid, pour order 0): 265,330
+5V on L3 "+5V_L03_P101" (solid, pour order 101): 0.25,3937.26 3937.26,3937.26 3937.26,0.25 14.75,0.25 0,15
UGND on L3 "UGND_L03_P024" (solid, pour order 24): 525,810 550,785 550,605 610,545 2010,545 2010,945 1910,945 1865,900 1865,762.73 1728.48,620 918.33,620 741,810
+6V on L3 "+6V_L03_P044" (solid, pour order 44): 1935,1010 2150,1010 2160,1020 2160,1285 2155,1290 1865,1290 1850,1275 1850,1025 1865,1010
no net on L3 "NONET_L03_P097" (solid, pour order 97): 513.51,511.65
VUSB on L3 "VUSB_L03_P026" (solid, pour order 26): 710,980 710,840 785,765 885,765 885,825 915,855 915,980
NetQ1_1 on L3 "NETQ1_1_L03_P012" (solid, pour order 12): 900,1475 900,2270 490,2270 490,1480 495,1475
X1 on L3 "X1_L03_P042" (solid, pour order 42): 2030,230 2030,545 2040,555 2160,555 2220,615 2215,620 2215,1800 2240,1825 2555,1825 2590,1790 2590,1675 2630,1635 2685,1635 2755,1565 2755,1525 2780,1500 2890,1500 2915,1525 2915,1605 2935,1625 3020,1625 3060,1585 3060,1490 3000,1430 2370,1430 2310,1370 2310,505 2215,410 2120,410 2085,375 2085,230 2080,225 2035,225
X1 on L3 "X1_L03_P048" (solid, pour order 48): 2915,1590 2915,2100 2885,2130 2500,2130 2460,2170 2460,2265 2485,2290 2500,2290 3010,2290 3080,2220 3080,1510 3000,1430 2910.56,1430
COM on L3 "COM_L03_P064" (solid, pour order 64): 3560,2980 3655,2980 3710,2925 3710,2405 3625,2320 3275,2320 3130,2465 2660,2465 2625,2430 2625,2375 2615,2365 2425,2365 2420,2370 2420,2780 2460,2820 2590,2820 2620,2790 2620,2605 2650,2575 3470,2575 3530,2635 3530,2950
no net on L3 "NONET_L03_P043" (solid, pour order 43): 1865,1080
+6V_In on L3 "+6V_IN_L03_P037" (solid, pour order 37): 3515,1120 3515,990 3515,710 3725,710 3780,765 3780,1085 3745,1120
VUSB on L3 "VUSB_L03_P031" (solid, pour order 31): 540,2501.4 540,2410 730,2410 755,2435 910,2435 910,2575 895,2590 820,2590 810,2580 810,2470 765,2470 765,2501.4
VUSB on L3 "VUSB_L03_P027" (solid, pour order 27): 2020,945 2020,560 2155,560 2215,620 2215,945
NetQ1_4 on L3 "NETQ1_4_L03_P021" (solid, pour order 21): 900,1465 900,995 485,995 450,1030 450,1305 425,1330 125,1330 75,1380 75,2285 150,2360 585,2360 585,2275 480,2275 480,1465 500,1465 505,1465
UGND on L3 "UGND_L03_P007" (solid, pour order 7): 290,970 290,790 300,780 755,780 760,790 760,870 760,925 710,980 305,980
+5V on L4 "+5V_L04_P086" (solid, pour order 86): 2275,990 2275,925 2285,915 2475,915 2490,930 2490,985 2485,990
+6V on L4 "+6V_L04_P050" (solid, pour order 50): 2430,1830 2430,1465 2445,1450 2610,1450 2645,1485 2645,1775 2665,1795 2630,1830
+5V on L4 "+5V_L04_P079" (solid, pour order 79): 3150,2290 3140,2300 3140,2490 3150,2500 3225,2500 3240,2485 3240,2300 3230,2290
+5V on L4 "+5V_L04_P076" (solid, pour order 76): 1985,1370 1985,1440 2000,1455 2135,1455 2160,1430 2400,1430 2419.07,1410.93 2395.67,1367.96
no net on L4 "NONET_L04_P075" (solid, pour order 75): 1984.41,1380.77
+5V on L4 "+5V_L04_P074" (solid, pour order 74): 1545,1390 1475,1315 1475,1090 1500,1065 1630,1065 1675,1110 1905,1110 1925,1130 1925,1285 1965,1325 2372.27,1325 2419.07,1410.93
+6V on L4 "+6V_L04_P045" (solid, pour order 45): 1945,1010 1940,1015 1940,1280 1960,1300 2360,1300 2485,1425 3070,1425 3160,1515 3160,1820 3200,1860 3765,1860 3795,1830 3795,1305 3765,1275 2810,1275 2760,1225 2760,1065 2690,995 1960,995 1960,1000 1940,1020
+5V on L4 "+5V_L04_P067" (solid, pour order 67): 2645,2250 2630,2235 2630,2090 2645,2075 2805,2075 2825,2095 2825,2235 2810,2250
+6V on L4 "+6V_L04_P047" (solid, pour order 47): 2980,2280 2900,2200 2900,2135 2935,2100 3135,2100 3250,1985 3250,1870 3240,1860 3255,1845 3475,1845 3485,1855 3485,2225 3430,2280
X2 on L4 "X2_L04_P066" (solid, pour order 66): 2670,1720 2650,1700 2650,1600 2660,1590 2840,1590 2890,1540 2890,1520 2900,1510 3070,1510 3085,1495 3140,1495 3155,1510 3155,1667.5 3032.5,1667.5 3005,1640 2870,1640 2790,1720
+6V on L4 "+6V_L04_P046" (solid, pour order 46): 2460,2060 2430,2030 2430,1830 2465,1795 2865,1795 2890,1770 2890,1695 2915,1670 3210,1670 3210,1855 3175,1890 3085,1890 3050,1925 2660,1925 2635,1950 2635,2035 2610,2060
no net on L4 "NONET_L04_P018" (solid, pour order 18): 505,1000
GND on L2 (split plane): 3917.16,20.35 20.35,20.35 20.35,3917.16 3917.16,3917.16

## Keep-outs
Keep-Out Layer:
  lines w4: 0.25,0.25 0.25,3937.26 ; 0.25,0.25 3937.26,0.25 ; 0.25,0.25 0.25,3937.26 ; 0.25,0.25 3937.26,0.25 ; 0.25,3937.26 3937.26,3937.26 ; 0.25,3937.26 3937.26,3937.26 ; 3937.26,0.25 3937.26,3937.26 ; 3937.26,0.25 3937.26,3937.26

## Silkscreen, mask and mechanical layers (free items; w line width, h text height)
Top Overlay:
  text "PROGRAMMER" at 3060,3895 h60 r180
  text "DEBUG" at 1269.61,3890.43 h60 r180
  text "R" at 2784.8,3860.11 h472.44 r180
  text "COMMAND" at 2095,3785 h60 r180
  text "ALARM" at 1585,3780 h60 r180
  text "POWER" at 2460,3780 h60 r180
  text "e" at 2996.84,3726.16 h236.22 r180
  text "b" at 3009.33,3608.63 h393.7 r180
  text "W" at 2785.87,3516.5 h236.22 r180
  text "UNED" at 3320,1815 h98.43 r90
  text "ionosens" at 3430,1670 h98.43 r90
  text "VISB" at 2185,725 h98.43 r180
  text "VISB" at 2235,550 h78.74 r180
  text "ETI" at 1140,300 h60
  text "VIN" at 905,295 h60
  text "PROG" at 200,255 h60
  text "DEBUG" at 3335.39,184.57 h60
  text "TX" at 930,125 h60
  text "RX" at 1160,125 h60
Mechanical 13:
  lines w28.54: 1423.74,271.39 ccw(c1438.01,271.39) 1452.28,271.39 ccw(c1438.01,271.39) 1423.74,271.39 ; 1423.74,3527.29 ccw(c1438.01,3527.29) 1452.28,3527.29 ccw(c1438.01,3527.29) 1423.74,3527.29 ; 2486.73,271.39 ccw(c2501,271.39) 2515.27,271.39 ccw(c2501,271.39) 2486.73,271.39 ; 2486.73,3527.29 ccw(c2501,3527.29) 2515.27,3527.29 ccw(c2501,3527.29) 2486.73,3527.29
Mechanical 15:
  drawing of 200 lines, arcs and shapes, not listed

## Text inside footprints (layer, text, board x,y; h text height)
J1: Mechanical 15 "1" at 1499.57,402.24 h39.37 r180; Mechanical 15 "2" at 1499.57,107.36 h39.37 r180
J2: Mechanical 15 "1" at 1499.57,3658.15 h39.37 r180; Mechanical 15 "2" at 1499.57,3363.27 h39.37 r180
J4: Top Overlay "1" at 3477.63,3540 h50 r180; Top Overlay "5" at 3074.83,3540 h50 r180; Top Overlay "6" at 3074.83,3440 h50 r180; Top Overlay "2" at 3477.63,3440 h50 r180; Mechanical 13 "1" at 3477.63,3540 h50 r180; Mechanical 13 "2" at 3477.63,3440 h50 r180; Mechanical 13 "5" at 3074.83,3540 h50 r180; Mechanical 13 "6" at 3074.83,3440 h50 r180
J6: Top Overlay "6" at 967.72,3478.66 h50; Top Overlay "1" at 264.92,3478.66 h50; Mechanical 13 "6" at 967.72,3478.66 h50; Mechanical 13 "1" at 264.92,3478.66 h50
J11: Top Overlay "1" at 391.86,386.65 h50; Top Overlay "5" at 794.66,386.65 h50; Top Overlay "6" at 794.66,486.65 h50; Top Overlay "2" at 391.86,486.65 h50; Mechanical 13 "1" at 391.86,386.65 h50; Mechanical 13 "2" at 391.86,486.65 h50; Mechanical 13 "5" at 794.66,386.65 h50; Mechanical 13 "6" at 794.66,486.65 h50
J12: Top Overlay "6" at 2648.86,465 h50 r180; Top Overlay "1" at 3351.65,465 h50 r180; Mechanical 13 "6" at 2648.86,465 h50 r180; Mechanical 13 "1" at 3351.65,465 h50 r180